# Altium PCB PCB1.PcbDoc
Units mm, origin at the board's own origin, x right, y up, seen from the top; angles counter-clockwise.
Board outline 72.5 x 77 mm, 2 copper layers (Top Layer, Bottom Layer); 7 components, 7 nets, 22 pads, 1103 vias.
Unrouted connection lines stored in the file: 4.
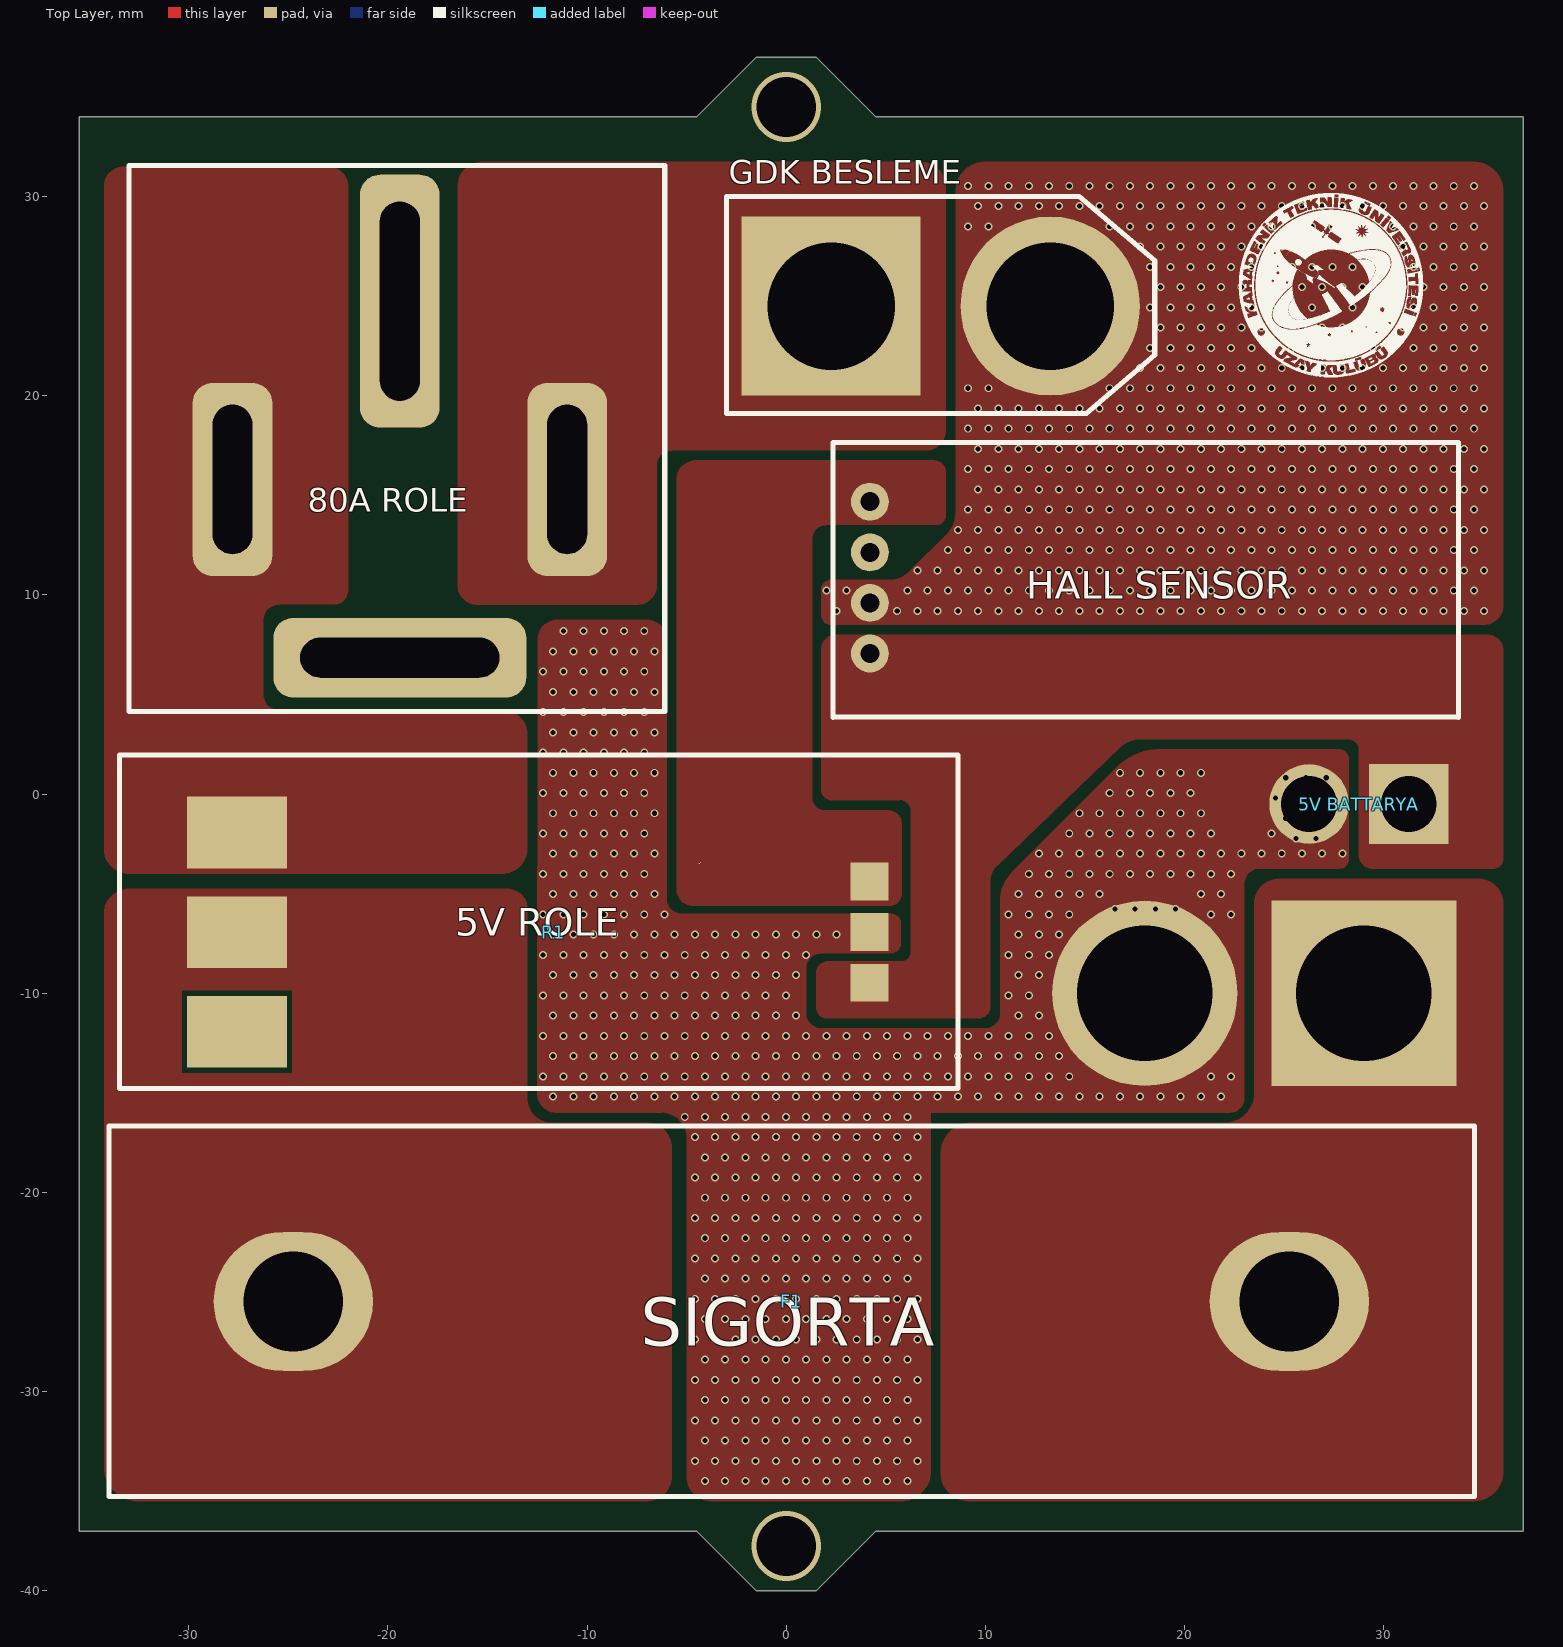
[diagram p0: Top Layer view]
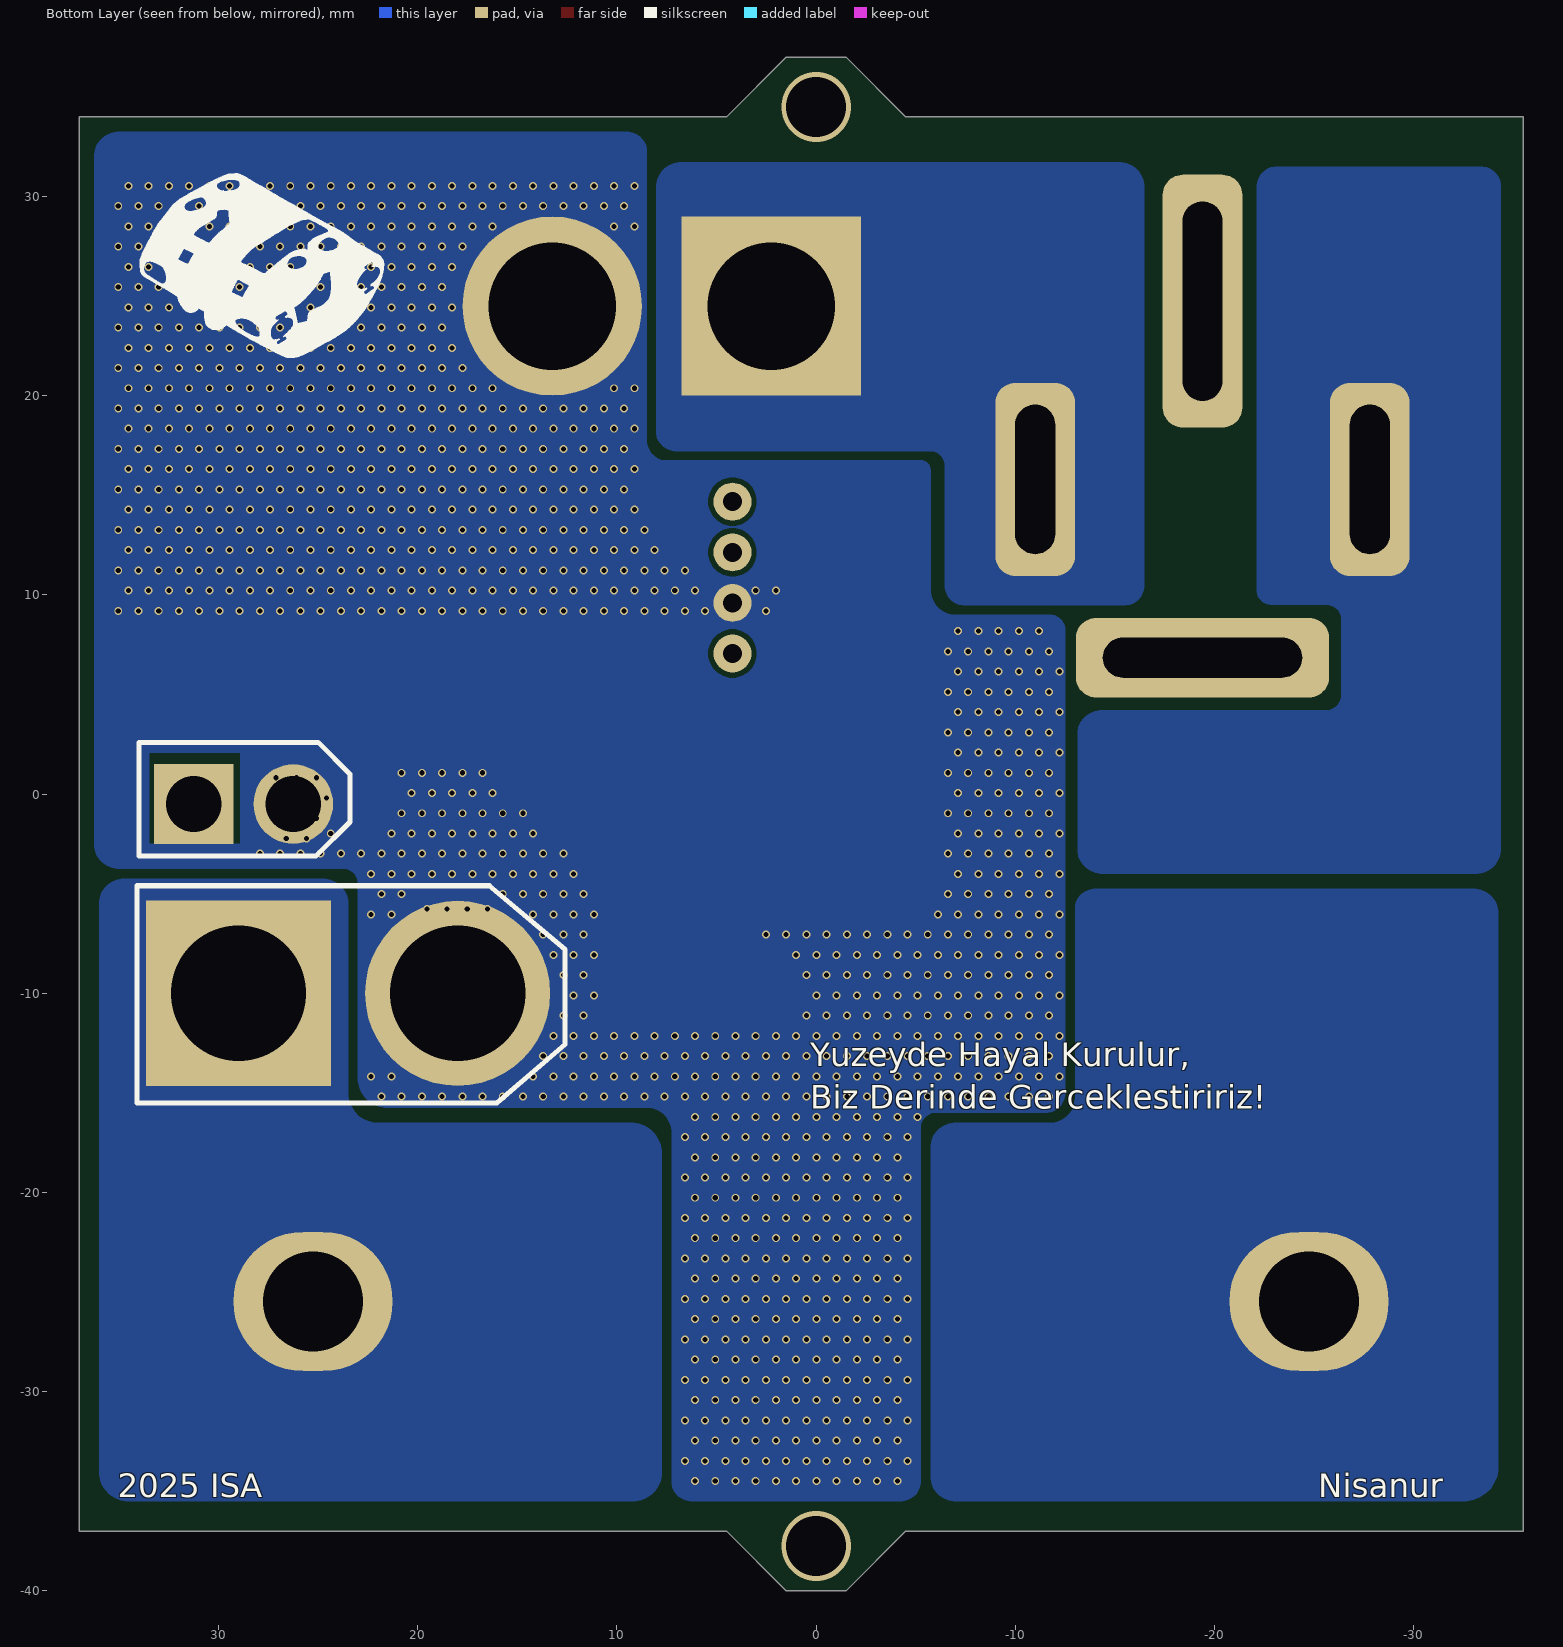
[diagram p1: Bottom Layer view, seen from below]
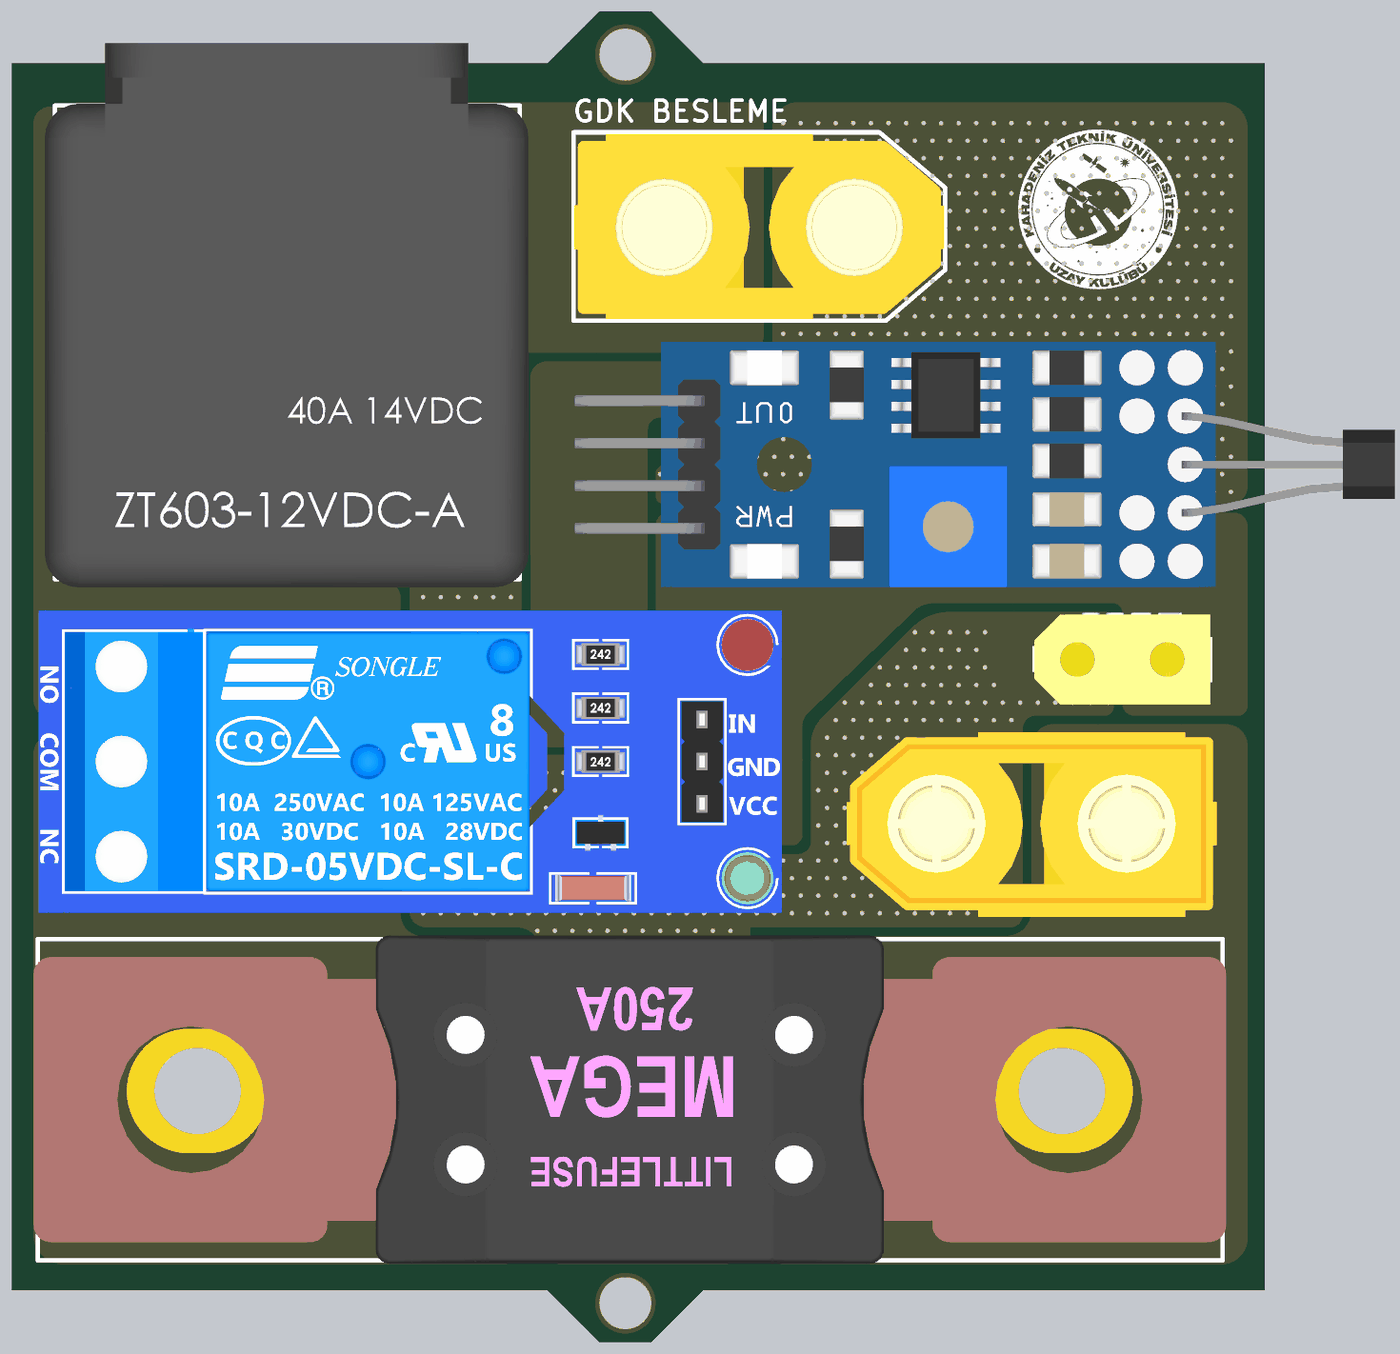
[diagram p2: 3D render of the assembled board from above, using the file's embedded part models]

## Layer stack, top to bottom
Top Solder: solder mask 0.0102, Solder Resist, Dk 3.5
Top Layer: signal copper 0.0356
Dielectric 1: dielectric 0.32, FR-4, Dk 4.8
Bottom Layer: signal copper 0.0356
Bottom Solder: solder mask 0.0102, Solder Resist, Dk 3.5

## Board outline
-35.5,-37 -35.5,34 -4.5,34 -1.5,37 1.5,37 4.5,34 37,34 37,-37 4.5,-37 1.5,-40 -1.5,-40 -4.5,-37

## Design rules (kind name [scope] priority, off if disabled: settings)
Clearance [All] p1: gap=0.254 ignorepadtopadclearanceinfootprint=FALSE
PolygonConnect [All] p1: connectstyle=Relief reliefconductorwidth=0.254 reliefentries=4 polygonreliefangle="90 Angle" airgapwidth=0.254
RoutingVias [All] p1: holewidth=0.711 width=1.27 viastyle="Through Hole" minholewidth=0.711 minwidth=1.27 maxholewidth=0.711 maxwidth=1.27
SolderMaskExpansion [All] p1: expansion=0.102 istentingtop=FALSE
Width [All] p1: maxlimit=0.254 minlimit=0.254 preferedwidth=0.254
30 further rules are at their usual default settings.

## Components (designator, comment, footprint, x,y, rotation, side; value= is the part's Value field where it differs from the comment)
"5V BATTARYA" "KÜÇÜK PİL GİRİŞ" "KÜÇÜK PİL GİRİŞ" 31.25,-0.5 r0 top (schematic designator K2)
"80A ROLE" "BÜYÜK RÖLE" "BÜYÜK RÖLE" -19.4,24.75 r90 top (schematic designator R2)
F1 "SİGORTA" SİGORTA 25.257,-25.471 r180 top
"GDK BESLEME" "GDK ÇIKIŞ" "GDK ÇIKIŞ" 2.25,24.5 r180 top (schematic designator K3)
"HALL SENSOR" "HALL SENSÖR" "HALL SENSÖR" 4.2,7.06 r180 top (schematic designator H1)
K1 "LİPO-PİL GİRİŞ" "LİPO-PİL GİRİŞ" 29,-10 r0 top
R1 "5V ROLE" "KÜÇÜK RÖLE" -27.575,-1.929 r0 top

## Footprints (in the part's own frame and the unit in brackets; to place one, negate y for a bottom-side part, rotate by r counter-clockwise, add the part's x,y. Pads: shape width x height; smd on the part's side, far side on the other; paste and mask are expansions set on the pad)
"BÜYÜK RÖLE" [mm]
  rrect50% 12.7x4 hole 2 slot 10 at 0 deg paste-2539.97 mask+0.051: 1(0,0)
  rrect50% 9.7x4 hole 2 slot 7.5 at 0 deg paste-2539.97 mask+0.051: 2(-8.95,8.4) 4(-8.95,-8.4)
  rrect50% 4x12.7 hole 2 slot 10 at 90 deg paste-2539.97 mask+0.051: 3(-17.9,0)
  silkscreen extent -20.6,-13.3 6.8,13.6, body extent -21.09,-13.8 10.42,14.2, height 11.1
"GDK ÇIKIŞ" [mm]
  rect 9x9 hole 6.4: 1(0,0)
  round 9 hole 6.4: 2(-11,0)
  body extent -16.2,-5.4 5.2,5.3, height 20.1
"HALL SENSÖR" [mil]
  round 75 hole 37.5 mask+1.97: 1(0,-300) 2(0,-200) 3(0,-100) 4(0,0)
  silkscreen extent -1163,-417 73,126, body extent -1587,-426 281,133, height 272
"KÜÇÜK PİL GİRİŞ" [mm]
  round 4 hole 2.8: N(-5,0)
  rect 4x4 hole 2.8: P(0,0)
  body extent -7.7,-2.6 2.7,2.7, height 12.6
"KÜÇÜK RÖLE" [mm]
  rect 5x3.6 smd paste-2539.97 mask+0.102: 1(0,0) 2(0,-5) 3(0,-10)
  rect 1.9x1.9 smd mask+0.05: 4(31.75,-2.46) 5(31.75,-5) 6(31.75,-7.54)
  silkscreen extent -5.9,-12.85 36.2,3.9, body extent -6.36,-13.23 36.64,4.27, height 18
"LİPO-PİL GİRİŞ" [mm]
  rect 9.3x9.3 hole 6.8: 1(0,0)
  round 9.3 hole 6.8: 2(-11,0)
  body extent -16.2,-5.4 5.2,5.3, height 20.8
SİGORTA [mm]
  oval 8x7 hole 5: 0(0,0) 1(50,0)
  silkscreen extent -9.3,-8.8 59.25,9.8, body extent -9.5,-9 59.5,10, height 10.5

## Part data
R1: library part "KÜÇÜK RÖLE"

## Via types
v1: diameter 0.4, hole 0.254, Top Layer to Bottom Layer, tented both sides, 1101 vias
v2: diameter 3.5, hole 3, Top Layer to Bottom Layer, 2 vias

## Nets (pads, with @x,y where several pads share a name; then routed paths per layer and width w, separated by ;. In a path a pad name is that pad's centre, name@x,y a point inside that pad or via, vN(x,y) a via of type N, cw(c..) or ccw(c..) an arc to the next point about the centre after c; other vN are vias at no path point)
GND: "5V BATTARYA.N" "GDK BESLEME.2" "HALL SENSOR.3" K1.2 R1.5
  other v1: -4.08,-34.488 -3.064,-34.488 -2.048,-34.488 -1.032,-34.488 -0.016,-34.488 1,-34.488 2.016,-34.488 3.032,-34.488 4.048,-34.488 5.064,-34.488 6.08,-34.488 -4.588,-33.472 -3.572,-33.472 -2.556,-33.472 -1.54,-33.472 -0.524,-33.472 0.492,-33.472 1.508,-33.472 2.524,-33.472 3.54,-33.472 4.556,-33.472 5.572,-33.472 6.588,-33.472 -4.08,-32.456 -3.064,-32.456 -2.048,-32.456 -1.032,-32.456 -0.016,-32.456 1,-32.456 2.016,-32.456 3.032,-32.456 4.048,-32.456 5.064,-32.456 6.08,-32.456 -4.588,-31.44 -3.572,-31.44 -2.556,-31.44 -1.54,-31.44 -0.524,-31.44 0.492,-31.44 1.508,-31.44 2.524,-31.44 3.54,-31.44 4.556,-31.44 5.572,-31.44 6.588,-31.44 -4.08,-30.424 -3.064,-30.424 -2.048,-30.424 -1.032,-30.424 -0.016,-30.424 1,-30.424 2.016,-30.424 3.032,-30.424 4.048,-30.424 5.064,-30.424 6.08,-30.424 -4.588,-29.408 -3.572,-29.408 -2.556,-29.408 -1.54,-29.408 -0.524,-29.408 0.492,-29.408 1.508,-29.408 2.524,-29.408 3.54,-29.408 4.556,-29.408 5.572,-29.408 6.588,-29.408 -4.08,-28.392 -3.064,-28.392 -2.048,-28.392 -1.032,-28.392 -0.016,-28.392 1,-28.392 2.016,-28.392 3.032,-28.392 4.048,-28.392 5.064,-28.392 6.08,-28.392 -4.588,-27.376 -3.572,-27.376 -2.556,-27.376 -1.54,-27.376 -0.524,-27.376 0.492,-27.376 1.508,-27.376 2.524,-27.376 3.54,-27.376 4.556,-27.376 5.572,-27.376 6.588,-27.376 -4.08,-26.36 -3.064,-26.36 -2.048,-26.36 -1.032,-26.36 -0.016,-26.36 1,-26.36 2.016,-26.36 3.032,-26.36 4.048,-26.36 5.064,-26.36 6.08,-26.36 -4.588,-25.344 -3.572,-25.344 -2.556,-25.344 -1.54,-25.344 -0.524,-25.344 0.492,-25.344 1.508,-25.344 2.524,-25.344 3.54,-25.344 4.556,-25.344 5.572,-25.344 6.588,-25.344 -4.08,-24.328 -3.064,-24.328 -2.048,-24.328 -1.032,-24.328 -0.016,-24.328 1,-24.328 2.016,-24.328 3.032,-24.328 4.048,-24.328 5.064,-24.328 6.08,-24.328 -4.588,-23.312 -3.572,-23.312 -2.556,-23.312 -1.54,-23.312 -0.524,-23.312 0.492,-23.312 1.508,-23.312 2.524,-23.312 3.54,-23.312 4.556,-23.312 5.572,-23.312 6.588,-23.312 -4.08,-22.296 -3.064,-22.296 -2.048,-22.296 -1.032,-22.296 -0.016,-22.296 1,-22.296 2.016,-22.296 3.032,-22.296 4.048,-22.296 5.064,-22.296 6.08,-22.296 -4.588,-21.28 -3.572,-21.28 -2.556,-21.28 -1.54,-21.28 -0.524,-21.28 0.492,-21.28 1.508,-21.28 2.524,-21.28 3.54,-21.28 4.556,-21.28 5.572,-21.28 6.588,-21.28 -4.08,-20.264 -3.064,-20.264 -2.048,-20.264 -1.032,-20.264 -0.016,-20.264 1,-20.264 2.016,-20.264 3.032,-20.264 4.048,-20.264 5.064,-20.264 6.08,-20.264 -4.588,-19.248 -3.572,-19.248 -2.556,-19.248 -1.54,-19.248 -0.524,-19.248 0.492,-19.248 1.508,-19.248 2.524,-19.248 3.54,-19.248 4.556,-19.248 5.572,-19.248 6.588,-19.248 -4.08,-18.232 -3.064,-18.232 -2.048,-18.232 -1.032,-18.232 -0.016,-18.232 1,-18.232 2.016,-18.232 3.032,-18.232 4.048,-18.232 5.064,-18.232 6.08,-18.232 -4.588,-17.216 -3.572,-17.216 -2.556,-17.216 -1.54,-17.216 -0.524,-17.216 0.492,-17.216 1.508,-17.216 2.524,-17.216 3.54,-17.216 4.556,-17.216 5.572,-17.216 6.588,-17.216 -5.096,-16.2 -4.08,-16.2 -3.064,-16.2 -2.048,-16.2 -1.032,-16.2 -0.016,-16.2 1,-16.2 2.016,-16.2 3.032,-16.2 4.048,-16.2 5.064,-16.2 6.08,-16.2 -11.7,-15.184 -10.684,-15.184 -9.668,-15.184 -8.652,-15.184 -7.636,-15.184 -6.62,-15.184 -5.604,-15.184 -4.588,-15.184 -3.572,-15.184 -2.556,-15.184 -1.54,-15.184 -0.524,-15.184 0.492,-15.184 1.508,-15.184 2.524,-15.184 3.54,-15.184 4.556,-15.184 5.572,-15.184 6.588,-15.184 7.604,-15.184 8.62,-15.184 9.636,-15.184 10.652,-15.184 11.668,-15.184 12.684,-15.184 13.7,-15.184 14.716,-15.184 15.732,-15.184 16.748,-15.184 17.764,-15.184 18.78,-15.184 19.796,-15.184 20.812,-15.184 21.828,-15.184 -12.208,-14.168 -11.192,-14.168 -10.176,-14.168 -9.16,-14.168 -8.144,-14.168 -7.128,-14.168 -6.112,-14.168 -5.096,-14.168 -4.08,-14.168 -3.064,-14.168 -2.048,-14.168 -1.032,-14.168 -0.016,-14.168 1,-14.168 2.016,-14.168 3.032,-14.168 4.048,-14.168 5.064,-14.168 6.08,-14.168 7.096,-14.168 8.112,-14.168 9.128,-14.168 10.144,-14.168 11.16,-14.168 12.176,-14.168 13.192,-14.168 14.208,-14.168 21.32,-14.168 22.336,-14.168 -11.7,-13.152 -10.684,-13.152 -9.668,-13.152 -8.652,-13.152 -7.636,-13.152 -6.62,-13.152 -5.604,-13.152 -4.588,-13.152 -3.572,-13.152 -2.556,-13.152 -1.54,-13.152 -0.524,-13.152 0.492,-13.152 1.508,-13.152 2.524,-13.152 3.54,-13.152 4.556,-13.152 5.572,-13.152 6.588,-13.152 7.604,-13.152 8.62,-13.152 9.636,-13.152 10.652,-13.152 11.668,-13.152 12.684,-13.152 13.7,-13.152 -12.208,-12.136 -11.192,-12.136 -10.176,-12.136 -9.16,-12.136 -8.144,-12.136 -7.128,-12.136 -6.112,-12.136 -5.096,-12.136 -4.08,-12.136 -3.064,-12.136 -2.048,-12.136 -1.032,-12.136 -0.016,-12.136 1,-12.136 2.016,-12.136 3.032,-12.136 4.048,-12.136 5.064,-12.136 6.08,-12.136 7.096,-12.136 8.112,-12.136 9.128,-12.136 10.144,-12.136 11.16,-12.136 12.176,-12.136 13.192,-12.136 -11.7,-11.12 -10.684,-11.12 -9.668,-11.12 -8.652,-11.12 -7.636,-11.12 -6.62,-11.12 -5.604,-11.12 -4.588,-11.12 -3.572,-11.12 -2.556,-11.12 -1.54,-11.12 -0.524,-11.12 0.492,-11.12 11.668,-11.12 12.684,-11.12 -12.208,-10.104 -11.192,-10.104 -10.176,-10.104 -9.16,-10.104 -8.144,-10.104 -7.128,-10.104 -6.112,-10.104 -5.096,-10.104 -4.08,-10.104 -3.064,-10.104 -2.048,-10.104 -1.032,-10.104 -0.016,-10.104 11.16,-10.104 12.176,-10.104 -11.7,-9.088 -10.684,-9.088 -9.668,-9.088 -8.652,-9.088 -7.636,-9.088 -6.62,-9.088 -5.604,-9.088 -4.588,-9.088 -3.572,-9.088 -2.556,-9.088 -1.54,-9.088 -0.524,-9.088 0.492,-9.088 11.668,-9.088 12.684,-9.088 -12.208,-8.072 -11.192,-8.072 -10.176,-8.072 -9.16,-8.072 -8.144,-8.072 -7.128,-8.072 -6.112,-8.072 -5.096,-8.072 -4.08,-8.072 -3.064,-8.072 -2.048,-8.072 -1.032,-8.072 -0.016,-8.072 1,-8.072 11.16,-8.072 12.176,-8.072 13.192,-8.072 -11.7,-7.056 -10.684,-7.056 -9.668,-7.056 -8.652,-7.056 -7.636,-7.056 -6.62,-7.056 -5.604,-7.056 -4.588,-7.056 -3.572,-7.056 -2.556,-7.056 -1.54,-7.056 -0.524,-7.056 0.492,-7.056 1.508,-7.056 2.524,-7.056 11.668,-7.056 12.684,-7.056 13.7,-7.056 -12.208,-6.04 -11.192,-6.04 -10.176,-6.04 -9.16,-6.04 -8.144,-6.04 -7.128,-6.04 -6.112,-6.04 11.16,-6.04 12.176,-6.04 13.192,-6.04 14.208,-6.04 21.32,-6.04 22.336,-6.04 16.498,-5.774 17.514,-5.774 18.53,-5.774 19.546,-5.774 -11.7,-5.024 -10.684,-5.024 -9.668,-5.024 -8.652,-5.024 -7.636,-5.024 -6.62,-5.024 11.668,-5.024 12.684,-5.024 13.7,-5.024 14.716,-5.024 15.732,-5.024 20.812,-5.024 21.828,-5.024 -12.208,-4.008 -11.192,-4.008 -10.176,-4.008 -9.16,-4.008 -8.144,-4.008 -7.128,-4.008 12.176,-4.008 13.192,-4.008 14.208,-4.008 15.224,-4.008 16.24,-4.008 17.256,-4.008 18.272,-4.008 19.288,-4.008 20.304,-4.008 21.32,-4.008 22.336,-4.008 -11.7,-2.992 -10.684,-2.992 -9.668,-2.992 -8.652,-2.992 -7.636,-2.992 -6.62,-2.992 12.684,-2.992 13.7,-2.992 14.716,-2.992 15.732,-2.992 16.748,-2.992 17.764,-2.992 18.78,-2.992 19.796,-2.992 20.812,-2.992 21.828,-2.992 22.844,-2.992 23.86,-2.992 24.876,-2.992 25.892,-2.992 26.908,-2.992 27.924,-2.992 25.586,-2.226 26.602,-2.226 -12.208,-1.976 -11.192,-1.976 -10.176,-1.976 -9.16,-1.976 -8.144,-1.976 -7.128,-1.976 14.208,-1.976 15.224,-1.976 16.24,-1.976 17.256,-1.976 18.272,-1.976 19.288,-1.976 20.304,-1.976 21.32,-1.976 24.368,-1.976 25.078,-1.21 26.094,-1.21 27.11,-1.21 -11.7,-0.96 -10.684,-0.96 -9.668,-0.96 -8.652,-0.96 -7.636,-0.96 -6.62,-0.96 14.716,-0.96 15.732,-0.96 16.748,-0.96 17.764,-0.96 18.78,-0.96 19.796,-0.96 20.812,-0.96 24.57,-0.194 25.586,-0.194 26.602,-0.194 -12.208,0.056 -11.192,0.056 -10.176,0.056 -9.16,0.056 -8.144,0.056 -7.128,0.056 16.24,0.056 17.256,0.056 18.272,0.056 19.288,0.056 20.304,0.056 25.078,0.822 26.094,0.822 27.11,0.822 -11.7,1.072 -10.684,1.072 -9.668,1.072 -8.652,1.072 -7.636,1.072 -6.62,1.072 16.748,1.072 17.764,1.072 18.78,1.072 19.796,1.072 20.812,1.072 -12.208,2.088 -11.192,2.088 -10.176,2.088 -9.16,2.088 -8.144,2.088 -7.128,2.088 -11.7,3.104 -10.684,3.104 -9.668,3.104 -8.652,3.104 -7.636,3.104 -6.62,3.104 -12.208,4.12 -11.192,4.12 -10.176,4.12 -9.16,4.12 -8.144,4.12 -7.128,4.12 -11.7,5.136 -10.684,5.136 -9.668,5.136 -8.652,5.136 -7.636,5.136 -6.62,5.136 -12.208,6.152 -11.192,6.152 -10.176,6.152 -9.16,6.152 -8.144,6.152 -7.128,6.152 -11.7,7.168 -10.684,7.168 -9.668,7.168 -8.652,7.168 -7.636,7.168 -6.62,7.168 -11.192,8.184 -10.176,8.184 -9.16,8.184 -8.144,8.184 -7.128,8.184 2.524,9.2 5.572,9.2 6.588,9.2 7.604,9.2 8.62,9.2 9.636,9.2 10.652,9.2 11.668,9.2 12.684,9.2 13.7,9.2 14.716,9.2 15.732,9.2 16.748,9.2 17.764,9.2 18.78,9.2 19.796,9.2 20.812,9.2 21.828,9.2 22.844,9.2 23.86,9.2 24.876,9.2 25.892,9.2 26.908,9.2 27.924,9.2 28.94,9.2 29.956,9.2 30.972,9.2 31.988,9.2 33.004,9.2 34.02,9.2 35.036,9.2 2.016,10.216 3.032,10.216 6.08,10.216 7.096,10.216 8.112,10.216 9.128,10.216 10.144,10.216 11.16,10.216 12.176,10.216 13.192,10.216 14.208,10.216 15.224,10.216 16.24,10.216 17.256,10.216 18.272,10.216 19.288,10.216 20.304,10.216 21.32,10.216 22.336,10.216 23.352,10.216 24.368,10.216 25.384,10.216 26.4,10.216 27.416,10.216 28.432,10.216 29.448,10.216 30.464,10.216 31.48,10.216 32.496,10.216 33.512,10.216 34.528,10.216 6.588,11.232 7.604,11.232 8.62,11.232 9.636,11.232 10.652,11.232 11.668,11.232 12.684,11.232 13.7,11.232 14.716,11.232 15.732,11.232 16.748,11.232 17.764,11.232 18.78,11.232 19.796,11.232 20.812,11.232 21.828,11.232 22.844,11.232 23.86,11.232 24.876,11.232 25.892,11.232 26.908,11.232 27.924,11.232 28.94,11.232 29.956,11.232 30.972,11.232 31.988,11.232 33.004,11.232 34.02,11.232 35.036,11.232 8.112,12.248 9.128,12.248 10.144,12.248 11.16,12.248 12.176,12.248 13.192,12.248 14.208,12.248 15.224,12.248 16.24,12.248 17.256,12.248 18.272,12.248 19.288,12.248 20.304,12.248 21.32,12.248 22.336,12.248 23.352,12.248 24.368,12.248 25.384,12.248 26.4,12.248 27.416,12.248 28.432,12.248 29.448,12.248 30.464,12.248 31.48,12.248 32.496,12.248 33.512,12.248 34.528,12.248 8.62,13.264 9.636,13.264 10.652,13.264 11.668,13.264 12.684,13.264 13.7,13.264 14.716,13.264 15.732,13.264 16.748,13.264 17.764,13.264 18.78,13.264 19.796,13.264 20.812,13.264 21.828,13.264 22.844,13.264 23.86,13.264 24.876,13.264 25.892,13.264 26.908,13.264 27.924,13.264 28.94,13.264 29.956,13.264 30.972,13.264 31.988,13.264 33.004,13.264 34.02,13.264 35.036,13.264 9.128,14.28 10.144,14.28 11.16,14.28 12.176,14.28 13.192,14.28 14.208,14.28 15.224,14.28 16.24,14.28 17.256,14.28 18.272,14.28 19.288,14.28 20.304,14.28 21.32,14.28 22.336,14.28 23.352,14.28 24.368,14.28 25.384,14.28 26.4,14.28 27.416,14.28 28.432,14.28 29.448,14.28 30.464,14.28 31.48,14.28 32.496,14.28 33.512,14.28 34.528,14.28 9.636,15.296 10.652,15.296 11.668,15.296 12.684,15.296 13.7,15.296 14.716,15.296 15.732,15.296 16.748,15.296 17.764,15.296 18.78,15.296 19.796,15.296 20.812,15.296 21.828,15.296 22.844,15.296 23.86,15.296 24.876,15.296 25.892,15.296 26.908,15.296 27.924,15.296 28.94,15.296 29.956,15.296 30.972,15.296 31.988,15.296 33.004,15.296 34.02,15.296 35.036,15.296 9.128,16.312 10.144,16.312 11.16,16.312 12.176,16.312 13.192,16.312 14.208,16.312 15.224,16.312 16.24,16.312 17.256,16.312 18.272,16.312 19.288,16.312 20.304,16.312 21.32,16.312 22.336,16.312 23.352,16.312 24.368,16.312 25.384,16.312 26.4,16.312 27.416,16.312 28.432,16.312 29.448,16.312 30.464,16.312 31.48,16.312 32.496,16.312 33.512,16.312 34.528,16.312 9.636,17.328 10.652,17.328 11.668,17.328 12.684,17.328 13.7,17.328 14.716,17.328 15.732,17.328 16.748,17.328 17.764,17.328 18.78,17.328 19.796,17.328 20.812,17.328 21.828,17.328 22.844,17.328 23.86,17.328 24.876,17.328 25.892,17.328 26.908,17.328 27.924,17.328 28.94,17.328 29.956,17.328 30.972,17.328 31.988,17.328 33.004,17.328 34.02,17.328 35.036,17.328 9.128,18.344 10.144,18.344 11.16,18.344 12.176,18.344 13.192,18.344 14.208,18.344 15.224,18.344 16.24,18.344 17.256,18.344 18.272,18.344 19.288,18.344 20.304,18.344 21.32,18.344 22.336,18.344 23.352,18.344 24.368,18.344 25.384,18.344 26.4,18.344 27.416,18.344 28.432,18.344 29.448,18.344 30.464,18.344 31.48,18.344 32.496,18.344 33.512,18.344 34.528,18.344 9.636,19.36 10.652,19.36 11.668,19.36 12.684,19.36 13.7,19.36 14.716,19.36 15.732,19.36 16.748,19.36 17.764,19.36 18.78,19.36 19.796,19.36 20.812,19.36 21.828,19.36 22.844,19.36 23.86,19.36 24.876,19.36 25.892,19.36 26.908,19.36 27.924,19.36 28.94,19.36 29.956,19.36 30.972,19.36 31.988,19.36 33.004,19.36 34.02,19.36 35.036,19.36 9.128,20.376 10.144,20.376 16.24,20.376 17.256,20.376 18.272,20.376 19.288,20.376 20.304,20.376 21.32,20.376 22.336,20.376 23.352,20.376 24.368,20.376 25.384,20.376 26.4,20.376 27.416,20.376 28.432,20.376 29.448,20.376 30.464,20.376 31.48,20.376 32.496,20.376 33.512,20.376 34.528,20.376 17.764,21.392 18.78,21.392 19.796,21.392 20.812,21.392 21.828,21.392 22.844,21.392 23.86,21.392 24.876,21.392 25.892,21.392 26.908,21.392 27.924,21.392 28.94,21.392 29.956,21.392 30.972,21.392 31.988,21.392 33.004,21.392 34.02,21.392 35.036,21.392 18.272,22.408 19.288,22.408 20.304,22.408 21.32,22.408 22.336,22.408 23.352,22.408 24.368,22.408 25.384,22.408 26.4,22.408 27.416,22.408 28.432,22.408 29.448,22.408 30.464,22.408 31.48,22.408 32.496,22.408 33.512,22.408 34.528,22.408 18.78,23.424 19.796,23.424 20.812,23.424 21.828,23.424 22.844,23.424 23.86,23.424 24.876,23.424 25.892,23.424 26.908,23.424 27.924,23.424 28.94,23.424 29.956,23.424 30.972,23.424 31.988,23.424 33.004,23.424 34.02,23.424 35.036,23.424 18.272,24.44 19.288,24.44 20.304,24.44 21.32,24.44 22.336,24.44 23.352,24.44 24.368,24.44 25.384,24.44 26.4,24.44 27.416,24.44 28.432,24.44 29.448,24.44 30.464,24.44 31.48,24.44 32.496,24.44 33.512,24.44 34.528,24.44 18.78,25.456 19.796,25.456 20.812,25.456 21.828,25.456 22.844,25.456 23.86,25.456 24.876,25.456 25.892,25.456 26.908,25.456 27.924,25.456 28.94,25.456 29.956,25.456 30.972,25.456 31.988,25.456 33.004,25.456 34.02,25.456 35.036,25.456 18.272,26.472 19.288,26.472 20.304,26.472 21.32,26.472 22.336,26.472 23.352,26.472 24.368,26.472 25.384,26.472 26.4,26.472 27.416,26.472 28.432,26.472 29.448,26.472 30.464,26.472 31.48,26.472 32.496,26.472 33.512,26.472 34.528,26.472 17.764,27.488 18.78,27.488 19.796,27.488 20.812,27.488 21.828,27.488 22.844,27.488 23.86,27.488 24.876,27.488 25.892,27.488 26.908,27.488 27.924,27.488 28.94,27.488 29.956,27.488 30.972,27.488 31.988,27.488 33.004,27.488 34.02,27.488 35.036,27.488 9.128,28.504 10.144,28.504 16.24,28.504 17.256,28.504 18.272,28.504 19.288,28.504 20.304,28.504 21.32,28.504 22.336,28.504 23.352,28.504 24.368,28.504 25.384,28.504 26.4,28.504 27.416,28.504 28.432,28.504 29.448,28.504 30.464,28.504 31.48,28.504 32.496,28.504 33.512,28.504 34.528,28.504 9.636,29.52 10.652,29.52 11.668,29.52 12.684,29.52 13.7,29.52 14.716,29.52 15.732,29.52 16.748,29.52 17.764,29.52 18.78,29.52 19.796,29.52 20.812,29.52 21.828,29.52 22.844,29.52 23.86,29.52 24.876,29.52 25.892,29.52 26.908,29.52 27.924,29.52 28.94,29.52 29.956,29.52 30.972,29.52 31.988,29.52 33.004,29.52 34.02,29.52 35.036,29.52 9.128,30.536 10.144,30.536 11.16,30.536 12.176,30.536 13.192,30.536 14.208,30.536 15.224,30.536 16.24,30.536 17.256,30.536 18.272,30.536 19.288,30.536 20.304,30.536 21.32,30.536 22.336,30.536 23.352,30.536 24.368,30.536 25.384,30.536 26.4,30.536 27.416,30.536 28.432,30.536 29.448,30.536 30.464,30.536 31.48,30.536 32.496,30.536 33.512,30.536 34.528,30.536
NetF1_0: F1.0 K1.1
NetF1_1: F1.1 R1.2
NetH1_1: "HALL SENSOR.1" R1.4
NetK3_1: "80A ROLE.4" "GDK BESLEME.1"
NetR1_1: "80A ROLE.2" R1.1
VCC_KÜÇÜK: "5V BATTARYA.P" "HALL SENSOR.4" R1.6
pads on no net: "80A ROLE.1" "80A ROLE.3" "HALL SENSOR.2" R1.3
copper on no net:
  other v2: 0,-37.75 0,34.5

## Polygon pours and split planes (outlines as drawn)
GND on Top Layer "GND_L01_P015" (solid, pour order 15): -11.499,8.75 -7,8.75 cw(c-7,7.75) -6,7.75 -6,-5.25 ccw(c-5.25,-5.25) -5.25,-6 5.25,-6 cw(c5.25,-6.5) 5.75,-6.5 5.75,-7.5 cw(c5.25,-7.5) 5.25,-8 1.75,-8 ccw(c1.75,-8.75) 1,-8.75 1,-11 ccw(c1.75,-11) 1.75,-11.75 10,-11.75 ccw(c10,-11) 10.75,-11 10.75,-5.354 cw(c12.811,-5.354) 11.354,-3.896 16.646,1.396 cw(c18.707,-0.664) 18.707,2.25 27.75,2.25 cw(c27.75,1.75) 28.25,1.75 28.25,-3.25 cw(c27.75,-3.25) 27.75,-3.75 23.75,-3.75 ccw(c23.75,-4.5) 23,-4.5 23,-15.25 cw(c22.25,-15.25) 22.25,-16 7.25,-16 7.25,-34 cw(c5.75,-34) 5.75,-35.5 -3.75,-35.5 cw(c-3.75,-34.25) -5,-34.25 -5,-17.25 ccw(c-6.25,-17.25) -6.25,-16 -11.501,-16 cw(c-11.501,-14.995) -12.506,-14.993 -12.467,7.784 cw(c-11.499,7.782)
GND on Top Layer "GND_L01_P014" (solid, pour order 14): 8.5,30.25 8.5,14.104 cw(c7.043,14.104) 8.073,13.073 6.177,11.177 cw(c5.146,12.207) 5.146,10.75 2.25,10.75 ccw(c2.25,10.25) 1.75,10.25 1.75,9 ccw(c2.25,9) 2.25,8.5 35,8.5 ccw(c35,9.5) 36,9.5 36,30.25 ccw(c34.5,30.25) 34.5,31.75 10,31.75 ccw(c10,30.25)
NetK3_1 on Top Layer "NETK3_1_L01_P009" (solid, pour order 9): -15.5,9.5 -7.5,9.5 ccw(c-7.5,10.5) -6.5,10.5 -6.5,16.5 cw(c-5.75,16.5) -5.75,17.25 7,17.25 ccw(c7,18.25) 8,18.25 8,30.5 ccw(c6.75,30.5) 6.75,31.75 -15.25,31.75 ccw(c-15.25,30.5) -16.5,30.5 -16.5,10.5 ccw(c-15.5,10.5)
NetR1_1 on Top Layer "NETR1_1_L01_P007" (solid, pour order 7): -33,-4 -14.25,-4 ccw(c-14.25,-2.75) -13,-2.75 -13,3 ccw(c-14.208,3) -14.208,4.208 -25.458,4.208 cw(c-25.458,5) -26.25,5 -26.25,8.75 cw(c-25.5,8.75) -25.5,9.5 -22.75,9.5 ccw(c-22.75,10.25) -22,10.25 -22,30.5 ccw(c-23,30.5) -23,31.5 -33.25,31.5 ccw(c-33.25,30.5) -34.25,30.5 -34.25,-2.75 ccw(c-33,-2.75)
NetF1_1 on Top Layer "NETF1_1_L01_P002" (solid, pour order 2): -33,-4.75 -14,-4.75 cw(c-14,-5.75) -13,-5.75 -13,-15.25 ccw(c-11.75,-15.25) -11.75,-16.5 -7,-16.5 cw(c-7,-17.75) -5.75,-17.75 -5.75,-34.25 cw(c-7,-34.25) -7,-35.5 -32.5,-35.5 cw(c-32.5,-33.75) -34.25,-33.75 -34.25,-6 cw(c-33,-6)
NetF1_0 on Top Layer "NETF1_0_L01_P000" (solid, pour order 0): 24.75,-4.25 34.75,-4.25 cw(c34.75,-5.5) 36,-5.5 36,-34 cw(c34.5,-34) 34.5,-35.5 9.2,-35.5 cw(c9.2,-34.05) 7.75,-34.05 7.75,-18.05 cw(c9.3,-18.05) 9.3,-16.5 22,-16.5 ccw(c22,-15) 23.5,-15 23.5,-5.5 cw(c24.75,-5.5)
VCC_KÜÇÜK on Top Layer "VCC_KÜÇÜK_L01_P003" (solid, pour order 3): 2.5,8 35.2,8 cw(c35.2,7.2) 36,7.2 36,-3.2 cw(c35.45,-3.2) 35.45,-3.75 29.45,-3.75 cw(c29.45,-3.05) 28.75,-3.05 28.75,2.25 ccw(c28.25,2.25) 28.25,2.75 17.768,2.75 ccw(c17.768,1.275) 16.744,2.337 10.539,-3.639 ccw(c11.192,-4.317) 10.25,-4.318 10.25,-10.65 cw(c9.65,-10.65) 9.65,-11.25 2.05,-11.25 cw(c2.05,-10.7) 1.5,-10.7 1.5,-9 cw(c2.1,-9) 2.1,-8.4 5.785,-8.4 ccw(c5.785,-7.935) 6.25,-7.935 6.25,-0.85 ccw(c5.7,-0.85) 5.7,-0.3 2.3,-0.3 cw(c2.3,0.25) 1.75,0.25 1.75,7.25 cw(c2.5,7.25)
NetH1_1 on Top Layer "NETH1_1_L01_P005" (solid, pour order 5): 5.8,-5 5.8,-1.5 ccw(c5.1,-1.5) 5.1,-0.8 1.9,-0.8 cw(c1.9,-0.2) 1.3,-0.2 1.3,12.8 cw(c2,12.8) 2,13.5 7.5,13.5 ccw(c7.5,14) 8,14 8,16.2 ccw(c7.45,16.2) 7.45,16.75 -4.55,16.75 ccw(c-4.55,15.8) -5.5,15.8 -5.5,-4.8 ccw(c-4.7,-4.8) -4.7,-5.6 5.2,-5.6 ccw(c5.2,-5)
GND on Bottom Layer "GND_L02_P022" (solid, pour order 22): 8.5,32.25 8.5,17.75 cw(c7.5,17.75) 7.5,16.75 -5.25,16.75 ccw(c-5.25,16.25) -5.75,16.25 -5.75,10.25 cw(c-7,10.25) -7,9 -11.75,9 ccw(c-11.75,8.25) -12.5,8.25 -12.5,-15 ccw(c-11.5,-15) -11.5,-16 -6,-16 cw(c-6,-16.75) -5.25,-16.75 -5.25,-34.5 ccw(c-4.25,-34.5) -4.25,-35.5 6.25,-35.5 ccw(c6.25,-34.5) 7.25,-34.5 7.25,-17 cw(c8.5,-17) 8.5,-15.75 21.5,-15.75 ccw(c21.5,-14.25) 23,-14.25 23,-4.5 cw(c23.75,-4.5) 23.75,-3.75 35,-3.75 ccw(c35,-2.5) 36.25,-2.5 36.25,32 ccw(c35,32) 35,33.25 9.5,33.25 ccw(c9.5,32.25)
NetR1_1 on Bottom Layer "NETR1_1_L02_P020" (solid, pour order 20): -33.123,-4 -14.373,-4 ccw(c-14.373,-2.75) -13.123,-2.75 -13.123,3 ccw(c-14.331,3) -14.331,4.208 -25.581,4.208 cw(c-25.581,5) -26.373,5 -26.373,8.75 cw(c-25.623,8.75) -25.623,9.5 -22.873,9.5 ccw(c-22.873,10.25) -22.123,10.25 -22.123,30.5 ccw(c-23.123,30.5) -23.123,31.5 -33.373,31.5 ccw(c-33.373,30.5) -34.373,30.5 -34.373,-2.75 ccw(c-33.123,-2.75)
NetK3_1 on Bottom Layer "NETK3_1_L02_P021" (solid, pour order 21): -15.47,9.47 -7.47,9.47 ccw(c-7.47,10.47) -6.47,10.47 -6.47,16.47 cw(c-5.72,16.47) -5.72,17.22 7.03,17.22 ccw(c7.03,18.22) 8.03,18.22 8.03,30.47 ccw(c6.78,30.47) 6.78,31.72 -15.22,31.72 ccw(c-15.22,30.47) -16.47,30.47 -16.47,10.47 ccw(c-15.47,10.47)
NetF1_0 on Bottom Layer "NETF1_0_L02_P019" (solid, pour order 19): 24.75,-4.25 34.75,-4.25 cw(c34.75,-5.5) 36,-5.5 36,-34 cw(c34.5,-34) 34.5,-35.5 9.2,-35.5 cw(c9.2,-34.05) 7.75,-34.05 7.75,-18.05 cw(c9.3,-18.05) 9.3,-16.5 22,-16.5 ccw(c22,-15) 23.5,-15 23.5,-5.5 cw(c24.75,-5.5)
NetF1_1 on Bottom Layer "NETF1_1_L02_P018" (solid, pour order 18): -33,-4.75 -14,-4.75 cw(c-14,-5.75) -13,-5.75 -13,-15.25 ccw(c-11.75,-15.25) -11.75,-16.5 -7,-16.5 cw(c-7,-17.75) -5.75,-17.75 -5.75,-34.25 cw(c-7,-34.25) -7,-35.5 -32.5,-35.5 cw(c-32.5,-33.75) -34.25,-33.75 -34.25,-6 cw(c-33,-6)

## Silkscreen, mask and mechanical layers (free items; w line width, h text height)
Top Overlay:
  drawing of 31 lines, arcs and shapes, not listed
Bottom Overlay:
  drawing of 18 lines, arcs and shapes, not listed
  text "Yuzeyde Hayal Kurulur," at 0.3,-13.65 h1.2
  text "Biz Derinde Gerceklestiririz!" at 0.3,-15.8 h1.2
  text "Nisanur" at -25.2,-35.3 h1.2
  text "2025 ISA" at 35.05,-35.3 h1.2
Drill Guide:
  lines w0.254: -35.5,-37 -6,-37 -4.5,-37 -1.5,-40 0,-40 1.5,-40 4.5,-37 37,-37 37,34 4.5,34 1.5,37 -1.5,37 -4.5,34 -35.5,34 -35.5,-37

## Text inside footprints (layer, text, board x,y; h text height)
F1: Top Overlay "SIGORTA" at -7.3,-27.7 h2.4